# EAGLE board hm2 (EAGLE 5.06)
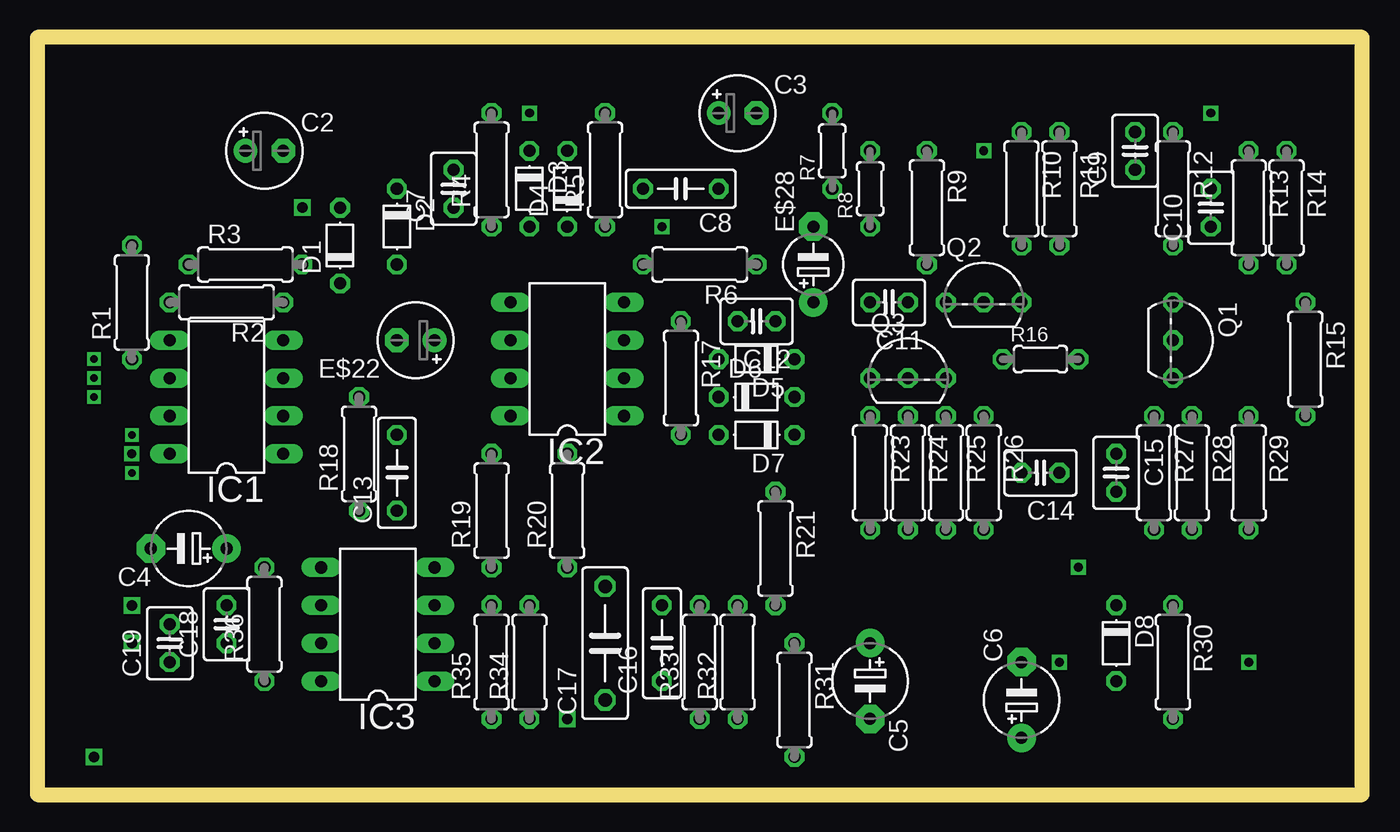
[diagram p0: board, top side]
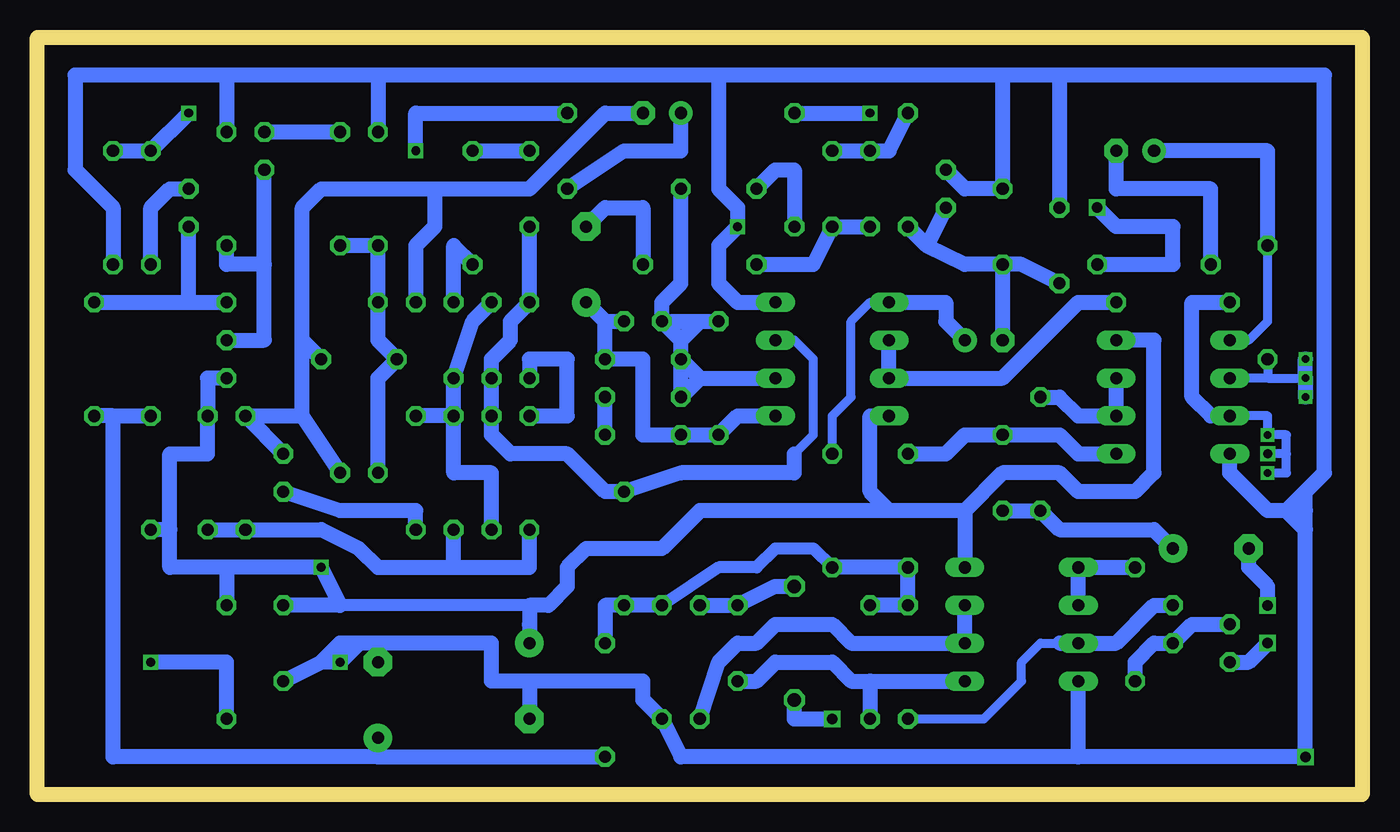
[diagram p1: board, bottom side, seen from below]

Size 88.9 x 50.8 mm. Coordinates in mm from the lower left corner, seen from the top.
Outline: 88.9,0 88.9,50.8 0,50.8 0,0 88.9,0
Copper layers (1*16): Top 0.035mm / dielectric 1.5mm / Bottom 0.035mm
Design rules "NYAKARUHAZ_StandardNYAK": minimum track width 6mil, minimum drill 12mil, track to track 6mil, track to pad 6mil, pad to pad 6mil, via to via 6mil, smd to smd 6mil, copper to edge 20mil, drill to drill 8mil, minimum pad ring 10mil, minimum via ring 8mil, stop-mask expansion 4mil, vias tented up to drill 0mil, thermal gap 6mil

## Footprints (pad centres in the part's own frame; a part is rotated, then mirrored left to right if it is on the bottom)
E2,5-5 = drill 0.813 pad 1.6 round: + -1.27,0 | drill 0.813 pad 1.6 octagon: - 1.27,0
E5-5 = drill 0.813 pad 1.905 round: + -2.54,0 | drill 0.813 pad 1.905 octagon: - 2.54,0
C025-030X050 = drill 0.813 octagon: 1 -1.27,0; 2 1.27,0
C050-025X075 = drill 0.813 octagon: 1 -2.54,0; 2 2.54,0
C075-032X103 = drill 0.914 octagon: 1 -3.81,0; 2 3.81,0
D-5 = drill 0.813 octagon: A 2.54,0; C -2.54,0
E5-4 = drill 0.813 pad 1.905 round: + -2.54,0 | drill 0.813 pad 1.905 octagon: - 2.54,0
DIL8 = drill 0.813 long: 1 -3.81,-3.81; 2 -1.27,-3.81; 3 1.27,-3.81; 4 3.81,-3.81; 5 3.81,3.81; 6 1.27,3.81; 7 -1.27,3.81; 8 -3.81,3.81
TO92- = drill 0.813 octagon: 1 -2.54,0; 2 0,0; 3 2.54,0
0207/7 = drill 0.813 octagon: 1 -3.81,0; 2 3.81,0
0204/5 = drill 0.813 octagon: 1 -2.54,0; 2 2.54,0

## Placement (x,y rotation side)
C2  10uF  [E2,5-5]  15.24,43.18 0 top
C3  10uF  [E2,5-5]  46.99,45.72 0 top
C4  1,5uF  [E5-5]  10.16,16.51 180 top
C5  47uF  [E5-5]  55.88,7.62 270 top
C6  47uF  [E5-5]  66.04,6.35 90 top
C7  1nF  [C025-030X050]  27.94,40.64 90 top
C8  47nF  [C050-025X075]  43.18,40.64 180 top
C9  47nF  [C025-030X050]  73.66,43.18 90 top
C10  47nF  [C025-030X050]  78.74,39.37 90 top
C11  10pF  [C025-030X050]  57.15,33.02 180 top
C12  [C025-030X050]  48.26,31.75 180 top
C13  68nF  [C050-025X075]  24.13,21.59 90 top
C14  10pF  [C025-030X050]  67.31,21.59 180 top
C15  47nF  [C025-030X050]  72.39,21.59 270 top
C16  6.8nF  [C050-025X075]  41.91,10.16 90 top
C17  150nF  [C075-032X103]  38.1,10.16 90 top
C18  4.7nF  [C025-030X050]  12.7,11.43 90 top
C19  100nF  [C025-030X050]  8.89,10.16 90 top
D1  4148  [D-5]  20.32,36.83 90 top
D2  4148  [D-5]  24.13,38.1 270 top
D3  1n34a  [D-5]  33.02,40.64 270 top
D4  1n34a  [D-5]  35.56,40.64 90 top
D5  4148  [D-5]  48.26,29.21 180 top
D6  4148  [D-5]  48.26,26.67 0 top
D7  4148  [D-5]  48.26,24.13 180 top
D8  4001  [D-5]  72.39,10.16 270 top
E$22  1uF  [E2,5-5]  25.4,30.48 180 top
E$28  1uF  [E5-4]  52.07,35.56 90 top
IC1  TL072  [DIL8]  12.7,26.67 90 top
IC2  TL072  [DIL8]  35.56,29.21 90 top
IC3  TL072  [DIL8]  22.86,11.43 90 top
Q1  [TO92-]  76.2,30.48 270 top
Q2  [TO92-]  63.5,33.02 0 top
Q3  [TO92-]  58.42,27.94 0 top
R1  3.3k  [0207/7]  6.35,33.02 90 top
R2  3,3K  [0207/7]  12.7,33.02 180 top
R3  10K  [0207/7]  13.97,35.56 0 top
R4  10k  [0207/7]  30.48,41.91 90 top
R5  47k  [0207/7]  38.1,41.91 90 top
R6  10k  [0207/7]  44.45,35.56 180 top
R7  150  [0204/5]  53.34,43.18 90 top
R8  10k  [0204/5]  55.88,40.64 90 top
R9  22  [0207/7]  59.69,39.37 270 top
R10  100k  [0207/7]  66.04,40.64 270 top
R11  22k  [0207/7]  68.58,40.64 270 top
R12  10k  [0207/7]  76.2,40.64 270 top
R13  10k  [0207/7]  81.28,39.37 270 top
R14  1M  [0207/7]  83.82,39.37 270 top
R15  1M  [0207/7]  85.09,29.21 270 top
R16  470k  [0204/5]  67.31,29.21 0 top
R17  220k  [0207/7]  43.18,27.94 270 top
R18  330  [0207/7]  21.59,22.86 90 top
R19  100k  [0207/7]  30.48,19.05 90 top
R20  68k  [0207/7]  35.56,19.05 90 top
R21  68k  [0207/7]  49.53,16.51 270 top
R23  120  [0207/7]  55.88,21.59 270 top
R24  470k  [0207/7]  58.42,21.59 270 top
R25  100k  [0207/7]  60.96,21.59 270 top
R26  22k  [0207/7]  63.5,21.59 270 top
R27  10K  [0207/7]  74.93,21.59 270 top
R28  1K  [0207/7]  77.47,21.59 270 top
R29  10K  [0207/7]  81.28,21.59 270 top
R30  4,7k  [0207/7]  76.2,8.89 270 top
R31  000  [0207/7]  50.8,6.35 270 top
R32  10k  [0207/7]  46.99,8.89 90 top
R33  330  [0207/7]  44.45,8.89 90 top
R34  82k  [0207/7]  33.02,8.89 90 top
R35  100k  [0207/7]  30.48,8.89 90 top
R36  330  [0207/7]  15.24,11.43 90 top

## Library data of the parts
C2-C19 E$22 R1-R21 R23-R36 = rcl
D1-D8 = diode
E$28 = ref-packages
IC1-IC3 = microchip
Q1-Q3 = maxim

## Nets
R8: C3.- C14.1 C15.1 Q2.2 R16.2 R27.1
S$1: C18.1 C19.2 R36.1
S$2: C18.2 IC3.7 R35.1
S$3: IC3.5 IC3.6 R36.2
S$4: C19.1
S$5: C4.-
S$6: C14.2 Q2.3 R10.2 R11.2 R16.1
S$7: C15.2 R26.2
S$8: C2.+ IC1.5 R1.2
S$9: R7.2
S$10: R19.1 R20.1 R21.2 R31.1 R32.2 R34.2 R35.2
S$11: C5.+ D8.C IC1.4 IC2.8 IC3.4 Q1.3 R28.1 R29.2 R30.1
S$12: IC1.6 R1.1
S$13: Q3.1 R23.1
S$14: C16.1 IC3.1 R34.1
S$15: IC3.2 IC3.3 R33.1
S$16: C11.2 IC2.3 Q3.2 R8.1 R21.1 R24.1
S$17: C4.+ C13.1 R18.1
S$18: IC1.7 R2.2
S$19: C13.2 IC1.1 R19.2
S$20: IC1.2 IC1.3 R18.2
S$21: C17.1
S$22: C16.2 C17.2 R33.2
S$23: E$22.+ IC2.5 R20.2
S$24: C3.+ R7.1
S$25: IC2.6 IC2.7 R2.1
S$26: C7.1 D1.C D2.A E$22.- R4.1
S$27: D3.C D4.A R4.2
S$28: R3.2
S$29: D3.A D4.C R6.2
S$30: C5.- C6.- C7.2 D1.A D2.C D8.A IC1.8 IC2.4 IC3.8 R10.1 R12.1 R14.2 R32.1
S$31: C12.1 D5.C D7.A E$28.+ IC2.1 R17.2
S$33: C8.1 C12.2 D5.A D6.C IC2.2 R17.1
S$34: E$28.- R6.1
S$35: D6.A D7.C
S$36: R5.2
S$37: C8.2 R5.1
S$38: C9.2 R11.1
S$40: R8.2 R9.1
S$41: C2.- R3.1
S$42: C11.1 Q3.3 R24.2 R25.1 R26.1
S$43: Q2.1 R9.2
S$46: C9.1 Q1.2 R12.2
S$49: C10.2 R13.2
S$50: C10.1 Q1.1 R15.1
S$51: R30.2
S$53: R23.2 R25.2 R27.2 R28.2
S$55: C6.+ R15.2 R29.1 R31.2
S$56: R13.1 R14.1

## Tracks (layer width: path | path; a pad name or v marks a point on that pad's centre or on a via)
R8
  Bottom 1.016: Q2.2 63.5,36.83 62.23,38.1 62.23,40.64 | 62.23,40.64 55.88,40.64 50.8,45.72 C3.- | 62.23,40.64 69.85,40.64 71.12,39.37 71.12,30.48 | 71.12,30.48 R16.2 | 71.12,25.4 C14.1 | 71.12,25.4 71.12,30.48 | C15.1 R27.1 71.12,25.4
S$1
  Bottom 1.016: C19.2 11.43,11.43 C18.1 13.97,10.16 15.24,8.89 R36.1
S$2
  Bottom 0.61: 20.32,10.16 21.59,10.16 22.86,8.89 22.86,7.62 25.4,5.08 R35.1
  Bottom 1.016: C18.2 13.97,12.7 16.51,10.16 IC3.7 20.32,10.16
S$3
  Bottom 1.016: R36.2 IC3.5 IC3.6
S$4  (via drill 0.7)
  Bottom 1.016: C19.1 7.62,8.89 v6.35,10.16
S$5  (via drill 0.7)
  Bottom 1.016: v6.35,12.7 6.35,13.97 7.62,15.24 C4.-
S$6
  Bottom 1.016: C14.2 66.04,27.94 R16.1 66.04,30.48 Q2.3 R10.2 R11.2
S$7
  Bottom 1.016: R26.2 63.5,19.05 68.58,19.05 C15.2
S$8
  Bottom 0.61: IC1.5 7.62,30.48 6.35,31.75 R1.2
  Bottom 1.016: R1.2 6.35,43.18 C2.+
S$9  (via drill 0.6)
  Bottom 1.016: R7.2 63.5,45.72 v63.5,43.18
S$10
  Bottom 0.813: R32.2 43.18,15.24 40.64,15.24 39.37,16.51 36.83,16.51 R20.1
  Bottom 1.016: R32.2 R21.2 50.8,12.7 R31.1 | R20.1 R19.1 R35.2 R34.2
S$11  (via drill 0.6)
  Bottom 0.813: 55.88,12.7 68.58,12.7
  Bottom 1.016: Q1.3 77.47,27.94 R28.1 77.47,22.86 80.01,22.86 80.01,17.78 | 80.01,17.78 R29.2 | 80.01,17.78 80.01,15.24 76.2,15.24 | 76.2,15.24 R30.1 | 76.2,15.24 v69.85,15.24 68.58,12.7 D8.C | 55.88,12.7 55.88,11.43 | 55.88,12.7 C5.+ | 55.88,12.7 54.61,12.7 53.34,13.97 53.34,15.24 52.07,16.51 46.99,16.51 44.45,19.05 31.75,19.05 | IC2.8 33.02,25.4 33.02,20.32 31.75,19.05 | 26.67,19.05 IC3.4 | 26.67,19.05 31.75,19.05 | 26.67,19.05 24.13,21.59 20.32,21.59 19.05,20.32 15.24,20.32 13.97,21.59 13.97,30.48 IC1.4
S$12  (via drill 0.5)
  Bottom 0.406: v3.81,26.67 v3.81,27.94 v3.81,29.21
  Bottom 0.61: 6.35,27.94 IC1.6 | 6.35,27.94 v3.81,27.94 | R1.1 6.35,27.94
  Bottom 1.016: v3.81,29.21 v3.81,27.94 v3.81,26.67
S$13
  Bottom 1.016: R23.1 53.34,25.4 53.34,29.21 55.88,29.21 Q3.1
S$14
  Bottom 1.016: 33.02,7.62 IC3.1 | 33.02,7.62 34.29,7.62 35.56,8.89 39.37,8.89 40.64,7.62 C16.1 | 33.02,7.62 R34.1
S$15
  Bottom 1.016: IC3.3 IC3.2 34.29,10.16 35.56,11.43 39.37,11.43 40.64,10.16 41.91,10.16 43.18,8.89 R33.1
S$16
  Bottom 0.61: IC2.3 38.1,30.48 36.83,29.21 36.83,24.13 38.1,22.86
  Bottom 1.016: 38.1,22.86 38.1,21.59 45.72,21.59 R21.1 50.8,20.32 53.34,22.86 57.15,22.86 58.42,24.13 R24.1 Q3.2 58.42,29.21 57.15,30.48 57.15,31.75 C11.2 R8.1
S$17
  Bottom 1.016: C13.1 R18.1 20.32,17.78 13.97,17.78 C4.+
S$18  (via drill 0.5, 0.6)
  Bottom 0.61: IC1.7 6.35,25.4 v6.35,24.13 5.08,24.13 5.08,22.86 | 5.08,22.86 v6.35,22.86 | 5.08,22.86 5.08,21.59 v6.35,21.59
  Bottom 1.016: R2.2 11.43,33.02 11.43,26.67 10.16,25.4 IC1.7
S$19
  Bottom 1.016: IC1.1 19.05,22.86 20.32,24.13 C13.2 26.67,24.13 27.94,22.86 R19.2
S$20
  Bottom 1.016: IC1.3 IC1.2 19.05,25.4 20.32,26.67 R18.2
S$21  (via drill 0.7)
  Bottom 1.016: v35.56,5.08 38.1,5.08 C17.1
S$22
  Bottom 1.016: C17.2 39.37,13.97 C16.2 R33.2
S$23
  Bottom 0.61: R20.2 35.56,25.4 34.29,26.67 34.29,31.75 33.02,33.02 IC2.5
  Bottom 1.016: IC2.5 27.94,33.02 27.94,31.75 E$22.+
S$24
  Bottom 1.016: C3.+ 45.72,43.18 49.53,43.18 R7.1
S$25
  Bottom 0.813: IC2.7 IC2.6
  Bottom 1.016: IC2.6 IC2.7 24.13,27.94 19.05,33.02 R2.1
S$26
  Bottom 1.016: D2.A 26.67,35.56 29.21,36.83 | D2.A E$22.- | D2.A 22.86,35.56 D1.C | 29.21,36.83 R4.1 | 29.21,36.83 C7.1
S$27
  Bottom 1.016: R4.2 31.75,43.18 D3.C D4.A
S$28  (via drill 0.7)
  Bottom 1.016: R3.2 12.7,35.56 12.7,38.1 16.51,38.1 v17.78,39.37
S$29
  Bottom 1.016: D3.A D4.C 36.83,35.56 R6.2
S$30  (via drill 0.6, 0.7)
  Bottom 0.61: 5.08,19.05 6.35,19.05
  Bottom 1.016: IC2.4 41.91,33.02 43.18,34.29 43.18,36.83 v41.91,38.1 41.91,39.37 43.18,40.64 43.18,48.26 | R14.2 83.82,39.37 86.36,41.91 86.36,48.26 76.2,48.26 | 76.2,48.26 R12.1 | C7.2 26.67,40.64 D2.C 24.13,48.26 | 66.04,48.26 R10.1 | 66.04,48.26 76.2,48.26 | 43.18,48.26 66.04,48.26 | 24.13,48.26 43.18,48.26 | 20.32,48.26 D1.A | 20.32,48.26 24.13,48.26 | 20.32,48.26 2.54,48.26 2.54,21.59 3.81,20.32 | 3.81,19.05 3.81,20.32 | 5.08,19.05 3.81,19.05 | 5.08,19.05 3.81,20.32 | 19.05,2.54 IC3.8 | 3.81,17.78 5.08,19.05 | 3.81,17.78 3.81,19.05 | 3.81,17.78 v3.81,2.54 19.05,2.54 | 19.05,2.54 45.72,2.54 R32.1 48.26,6.35 48.26,7.62 55.88,7.62 | 69.85,8.89 D8.A | 68.58,10.16 69.85,8.89 | v68.58,8.89 68.58,10.16 | v68.58,8.89 69.85,8.89 | 67.31,10.16 v68.58,8.89 | 67.31,10.16 68.58,10.16 | 66.04,10.16 67.31,10.16 | 66.04,10.16 C6.- | 66.04,10.16 58.42,10.16 58.42,7.62 55.88,7.62 | 55.88,7.62 C5.- | 3.81,19.05 6.35,19.05 8.89,21.59 IC1.8
S$31
  Bottom 1.016: 50.8,31.75 C12.1 | IC2.1 41.91,25.4 R17.2 D7.A 48.26,24.13 48.26,29.21 D5.C 50.8,31.75 | 50.8,31.75 E$28.+
S$33
  Bottom 1.016: 44.45,31.75 R17.1 | C12.2 44.45,31.75 | C12.2 46.99,33.02 45.72,34.29 C8.1 | 45.72,30.48 C12.2 | 45.72,30.48 44.45,31.75 | D5.A 45.72,30.48 | 44.45,27.94 IC2.2 | 44.45,27.94 D5.A | 44.45,27.94 D6.C D5.A
S$34
  Bottom 1.016: R6.1 48.26,39.37 50.8,39.37 E$28.-
S$35
  Bottom 1.016: D7.C D6.A
S$36  (via drill 0.6)
  Bottom 1.016: R5.2 v33.02,45.72
S$37
  Bottom 1.016: R5.1 38.1,41.91 39.37,41.91 C8.2
S$38
  Bottom 1.016: C9.2 R11.1
S$40
  Bottom 1.016: R9.1 R8.2
S$41
  Bottom 1.016: R3.1 10.16,40.64 16.51,40.64 C2.-
S$42
  Bottom 1.016: R25.1 R26.1 | R25.1 60.96,21.59 58.42,21.59 R24.2 | R25.1 Q3.3 59.69,31.75 C11.1
S$43
  Bottom 1.016: R9.2 60.96,36.83 Q2.1
S$46
  Bottom 1.016: 73.66,35.56 C9.1 | 73.66,35.56 76.2,35.56 R12.2 | 73.66,35.56 73.66,30.48 Q1.2
S$49
  Bottom 1.016: C10.2 80.01,40.64 81.28,39.37 R13.2
S$50
  Bottom 1.016: R15.1 78.74,33.02 | 78.74,33.02 C10.1 | 78.74,33.02 Q1.1
S$51  (via drill 0.6)
  Bottom 1.016: R30.2 76.2,8.89 v81.28,8.89
S$53
  Bottom 1.016: R23.2 55.88,15.24 60.96,15.24 | 60.96,15.24 R25.2 | 60.96,15.24 66.04,15.24 67.31,16.51 69.85,17.78 R27.2 R28.2
S$55
  Bottom 1.016: 83.82,25.4 R15.2 | 83.82,25.4 R29.1 | 83.82,25.4 83.82,2.54 66.04,2.54 | C6.+ 66.04,2.54 | 66.04,2.54 R31.2
S$56  (via drill 0.6)
  Bottom 1.016: R14.1 R13.1 v78.74,45.72